# EAGLE board tdr (EAGLE 9.6.2)
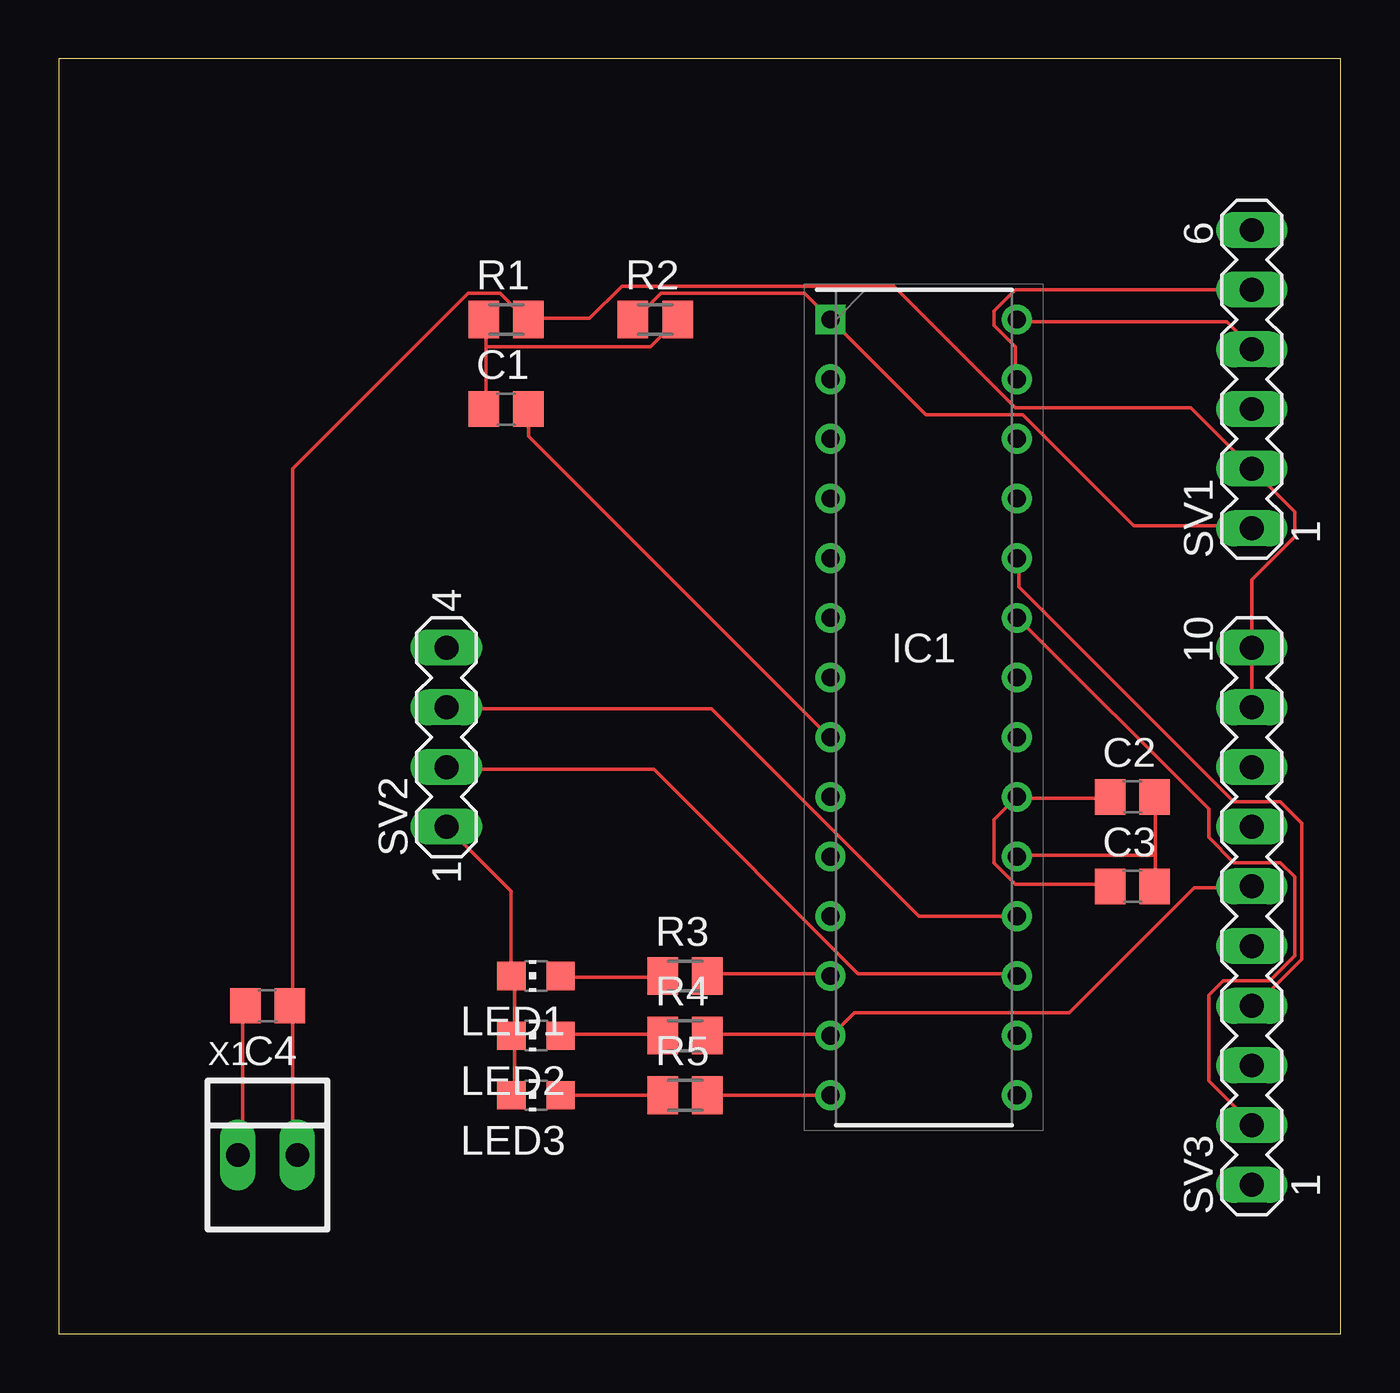
[diagram p0: board, top side]
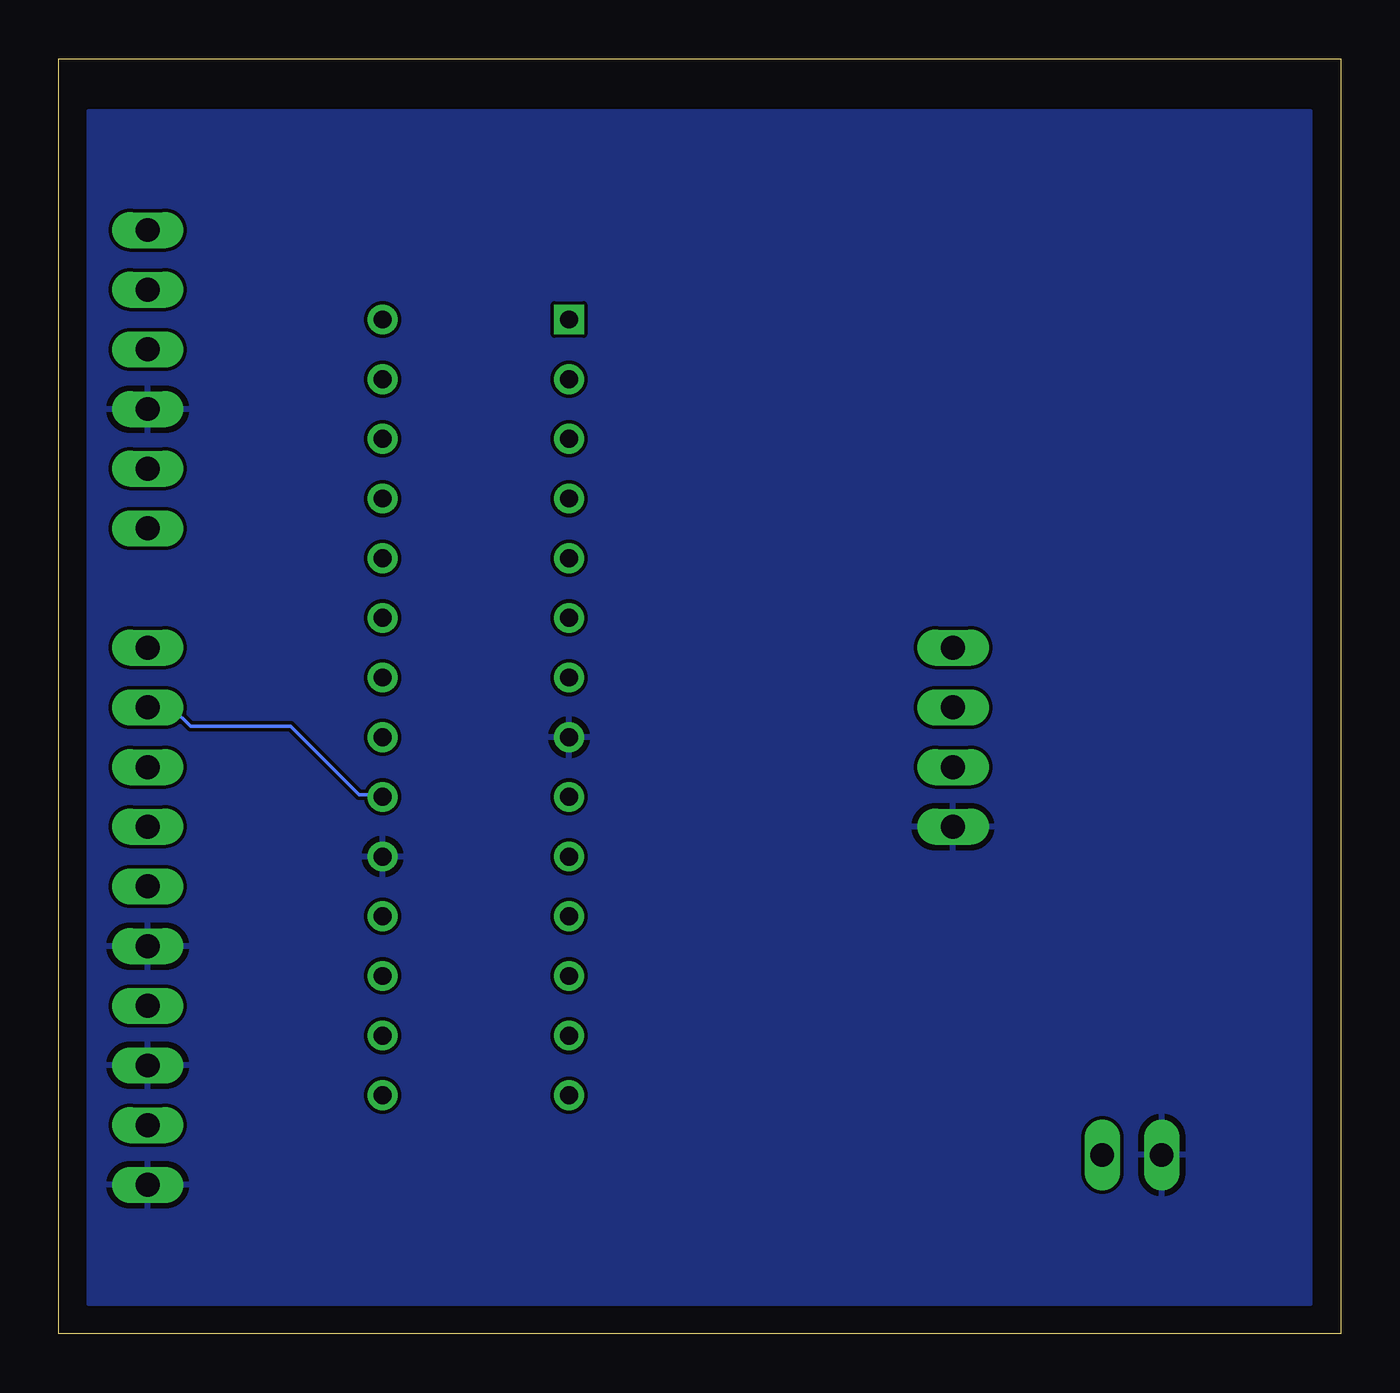
[diagram p1: board, bottom side, seen from below]

Size 54.59 x 54.28 mm. Coordinates in mm from the lower left corner, seen from the top.
Outline: 0,0 54.59,0 54.59,54.28 0,54.28 0,0
Copper layers (1*16): Top 0.035mm / dielectric 1.5mm / Bottom 0.035mm
Design rules "default": minimum track width 6mil, minimum drill 0.35mm, track to track 6mil, track to pad 6mil, pad to pad 6mil, via to via 6mil, smd to smd 6mil, copper to edge 40mil, drill to drill 6mil, minimum pad ring 10mil, minimum via ring 8mil, stop-mask expansion 4mil, vias tented up to drill 0mil, thermal gap 10mil

## Footprints (pad centres in the part's own frame; a part is rotated, then mirrored left to right if it is on the bottom)
C0805 = smd 1.3 x 1.5: 1 -0.95,0; 2 0.95,0
DIP794W56P254L3486H508Q28N = drill 0.759 pad 1.159 square: 1 -3.969,16.51 | drill 0.759 pad 1.159: 2 -3.969,13.97; 3 -3.969,11.43; 4 -3.969,8.89; 5 -3.969,6.35; 6 -3.969,3.81; 7 -3.969,1.27; 8 -3.969,-1.27; 9 -3.969,-3.81; 10 -3.969,-6.35; 11 -3.969,-8.89; 12 -3.969,-11.43; 13 -3.969,-13.97; 14 -3.969,-16.51; 15 3.969,-16.51; 16 3.969,-13.97; 17 3.969,-11.43; 18 3.969,-8.89; 19 3.969,-6.35; 20 3.969,-3.81; 21 3.969,-1.27; 22 3.969,1.27; 23 3.969,3.81; 24 3.969,6.35; 25 3.969,8.89; 26 3.969,11.43; 27 3.969,13.97; 28 3.969,16.51
CHIP-LED0805 = smd 1.2 x 1.2: A 0,-1.05; C 0,1.05
M0805 = smd 1.3 x 1.6: 1 -0.95,0; 2 0.95,0
MA06-1 = drill 1.016 long: 1 -6.35,0; 2 -3.81,0; 3 -1.27,0; 4 1.27,0; 5 3.81,0; 6 6.35,0
MA04-1 = drill 1.016 long: 1 -3.81,0; 2 -1.27,0; 3 1.27,0; 4 3.81,0
MA10-1 = drill 1.016 long: 1 -11.43,0; 2 -8.89,0; 3 -6.35,0; 4 -3.81,0; 5 -1.27,0; 6 1.27,0; 7 3.81,0; 8 6.35,0; 9 8.89,0; 10 11.43,0
22-23-2021 = drill 1 long: 1 -1.27,0; 2 1.27,0

## Placement (x,y rotation side)
C1  0.1uf  [C0805]  19.05,39.37 0 top
C2  0.1uf  [C0805]  45.72,22.86 0 top
C3  10uf  [C0805]  45.72,19.05 0 top
C4  0.1uf  [C0805]  8.89,13.97 180 top
IC1  PIC18F25K22-I_SP  [DIP794W56P254L3486H508Q28N]  36.83,26.67 0 top
LED1  [CHIP-LED0805]  20.32,15.24 90 top
LED2  [CHIP-LED0805]  20.32,12.7 90 top
LED3  [CHIP-LED0805]  20.32,10.16 90 top
R1  [M0805]  19.05,43.18 0 top
R2  [M0805]  25.4,43.18 0 top
R3  [M0805]  26.67,15.24 0 top
R4  [M0805]  26.67,12.7 0 top
R5  [M0805]  26.67,10.16 0 top
SV1  [MA06-1]  50.8,40.64 90 top
SV2  [MA04-1]  16.51,25.4 90 top
SV3  [MA10-1]  50.8,17.78 90 top
X1  22-23-2021  [22-23-2021]  8.89,7.62 0 top

## Library data of the parts
C1-C4 = rcl; SPICEPREFIX: C
IC1 = PIC18F25K22-I_SP; DESCRIPTION: MCU 8-Bit PIC18 32KB Flash XLP SPDIP28 Microchip PIC18F25K22-I/SP, 8bit PIC Microcontroller, 64MHz, 32 kB Flash, 28-Pin PDIP; HEIGHT: 5.08mm; MANUFACTURER_NAME: Microchip; MANUFACTURER_PART_NUMBER: PIC18F25K22-I/SP; MOUSER_PART_NUMBER: 579-PIC18F25K22ISP; MOUSER_PRICE-STOCK: https://www.mouser.co.uk/ProductDetail/Microchip-Technology/PIC18F25K22-I-SP?qs=RXaOwepKlZ25c3%2FxinGXiw%3D%3D
LED1-LED3 = led
R1-R5 = rcl; SPICEPREFIX: R
SV1-SV3 = con-lstb; OC_FARNELL: unknown; OC_NEWARK: unknown
X1 = con-molex; MF: MOLEX; MPN: 22-23-2021; OC_FARNELL: 1462926; OC_NEWARK: 25C3832

## Nets
CTED1: IC1.23 SV3.2
CTED2: IC1.24 SV3.4
CTPLS: IC1.13 R4.2 SV3.6
MCLR: IC1.1 R2.1 SV1.1
N$1: C1.1 R1.1 R2.2
N$2: IC1.12 R3.2
N$4: IC1.14 R5.2
N$5: LED1.A R3.1
N$6: LED2.A R4.1
N$7: LED3.A R5.1
PGC: IC1.27 SV1.5
PGD: IC1.28 SV1.4
RX1: IC1.18 SV2.3
TX1: IC1.17 SV2.2
VDD: C2.1 C3.1 C4.1 IC1.20 R1.2 SV1.2 SV3.9 SV3.10 X1.2
VSS: C1.2 C2.2 C3.2 C4.2 IC1.8 IC1.19 LED1.C LED2.C LED3.C SV1.3 SV2.1 SV3.1 SV3.3 SV3.5 X1.1

## Tracks (layer width: path | path; a pad name or v marks a point on that pad's centre or on a via)
CTED1
  Top 0.152: IC1.23 40.89,30.43 48.97,22.35 48.97,21.13 50.04,20.07 52.02,20.07 52.63,19.46 52.63,16.1 51.56,15.04 49.58,15.04 48.97,14.43 48.97,10.77 50.8,8.94 SV3.2
CTED2
  Top 0.152: SV3.4 50.95,13.97 52.93,15.95 52.93,21.74 52.02,22.66 50.04,22.66 40.89,31.8 40.89,33.02 IC1.24
CTPLS
  Top 0.152: R4.2 27.63,12.75 32.82,12.75 IC1.13 32.97,12.75 33.88,13.67 43.03,13.67 48.36,19 50.8,19 SV3.6
MCLR
  Top 0.152: R2.1 24.59,43.23 25.65,44.3 31.75,44.3 32.82,43.23 IC1.1 32.97,43.08 36.93,39.12 41.05,39.12 45.77,34.39 50.8,34.39 SV1.1
N$1
  Top 0.152: 18.19,42.01 18.19,43.08 R1.1 | 18.19,42.01 18.19,39.42 C1.1 | 18.19,42.01 25.2,42.01 26.26,43.08 R2.2
N$2
  Top 0.152: R3.2 27.63,15.34 32.82,15.34 IC1.12
N$4
  Top 0.152: IC1.14 R5.2
N$5
  Top 0.152: LED1.A 21.39,15.19 25.65,15.19 R3.1
N$6
  Top 0.152: LED2.A 21.39,12.75 25.65,12.75 R4.1
N$7
  Top 0.152: R5.1 LED3.A
PGC
  Top 0.152: SV1.5 40.74,44.45 39.83,43.54 39.83,42.93 40.74,42.01 40.74,40.64 IC1.27
PGD
  Top 0.152: IC1.28 40.89,43.08 49.73,43.08 50.8,42.01 SV1.4
RX1
  Top 0.152: IC1.18 36.63,17.78 27.79,26.62 16.51,26.62 SV2.3
TX1
  Top 0.152: IC1.17 40.74,15.34 34.04,15.34 25.35,24.03 16.51,24.03 SV2.2
VDD
  Top 0.152: 9.96,13.97 9.96,7.87 10.11,7.72 X1.2 | C3.1 44.7,19.15 40.74,19.15 39.83,20.07 39.83,21.89 40.74,22.81 IC1.20 40.89,22.81 44.7,22.81 C2.1 | SV3.9 SV3.10 50.8,32.11 52.63,33.93 52.63,35 SV1.2 48.21,39.42 40.74,39.42 35.56,44.6 23.98,44.6 22.61,43.23 20.02,43.23 R1.2 19.86,43.23 18.8,44.3 17.42,44.3 9.96,36.83 9.96,13.97 | 9.96,13.97 C4.1
  Bottom 0.152: IC1.20 40.89,22.96 41.81,22.96 44.7,25.86 48.97,25.86 49.73,26.62 50.8,26.62 SV3.9
VSS
  Top 0.152: LED3.C 19.41,10.16 19.41,12.6 LED2.C 19.41,12.75 19.41,15.19 LED1.C 19.25,15.34 19.25,18.85 SV2.1 | 46.69,20.37 46.69,22.81 C2.2 | 46.69,20.37 46.69,19.15 C3.2 | C4.2 7.82,13.97 7.82,7.87 7.67,7.72 X1.1 | C1.2 20.02,39.27 20.02,38.2 32.82,25.4 IC1.8 | 46.69,20.37 40.89,20.37 IC1.19
  pour Bottom: 1.27,52.07 53.34,52.07 53.34,1.27 1.27,1.27